# Altium PCB control_block.PcbDoc
Units mm, origin at the board's own origin, x right, y up, seen from the top; angles counter-clockwise.
Board outline 62.5 x 45 mm, 2 copper layers (Top Layer, Bottom Layer), stack 1.5 mm thick; 41 components, 31 nets, 165 pads, 15 vias.
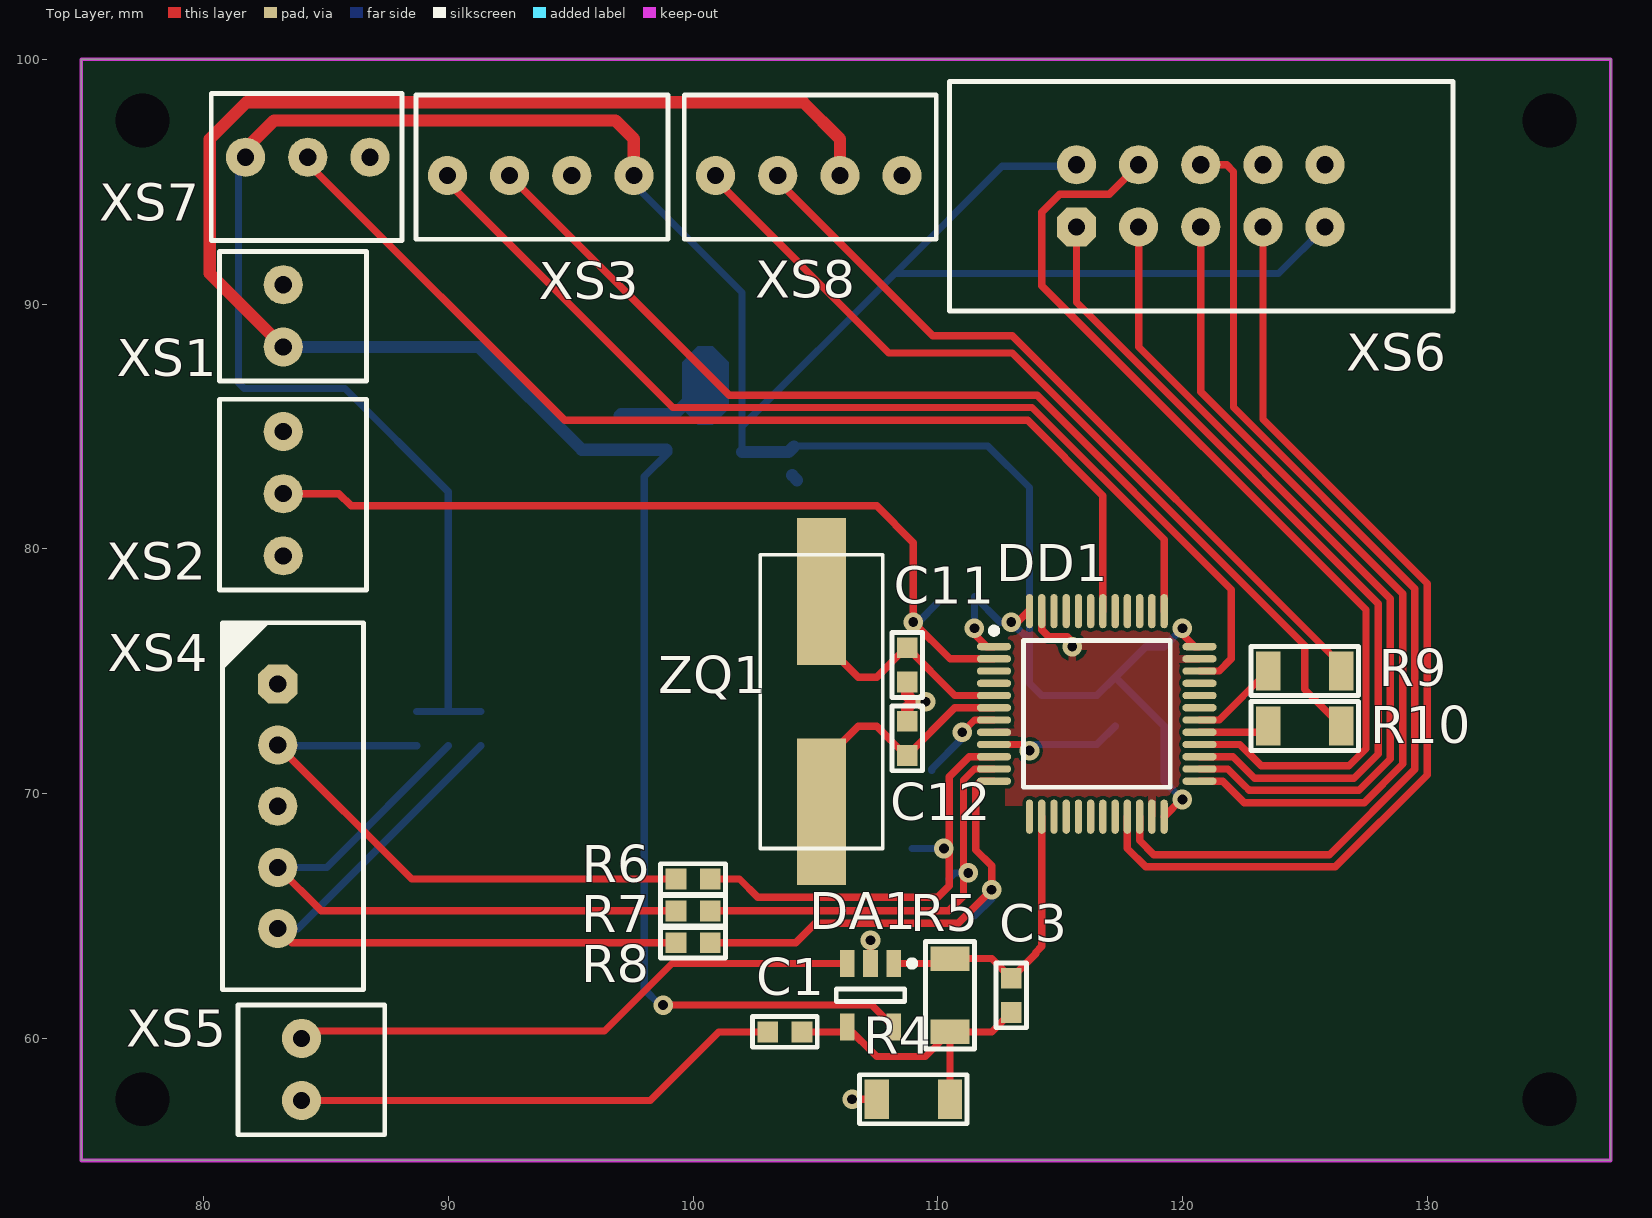
[diagram p0: Top Layer view]
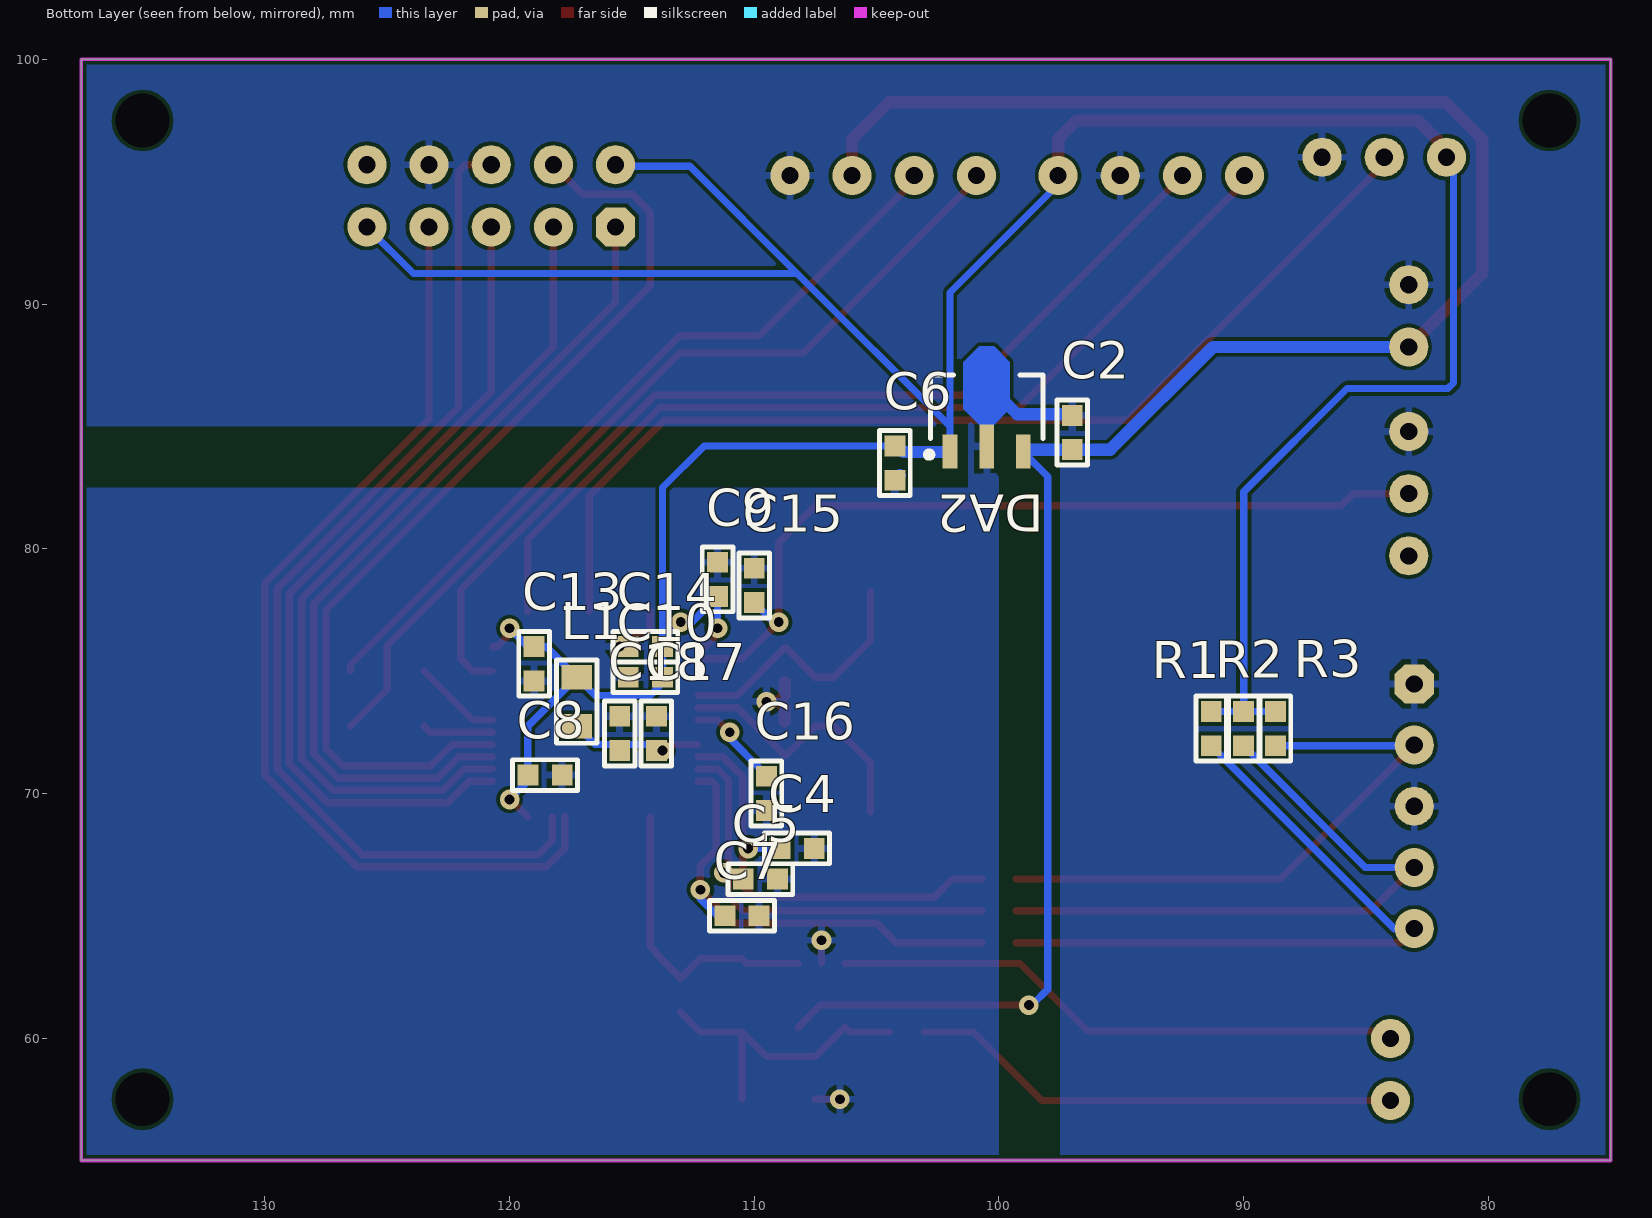
[diagram p1: Bottom Layer view, seen from below]
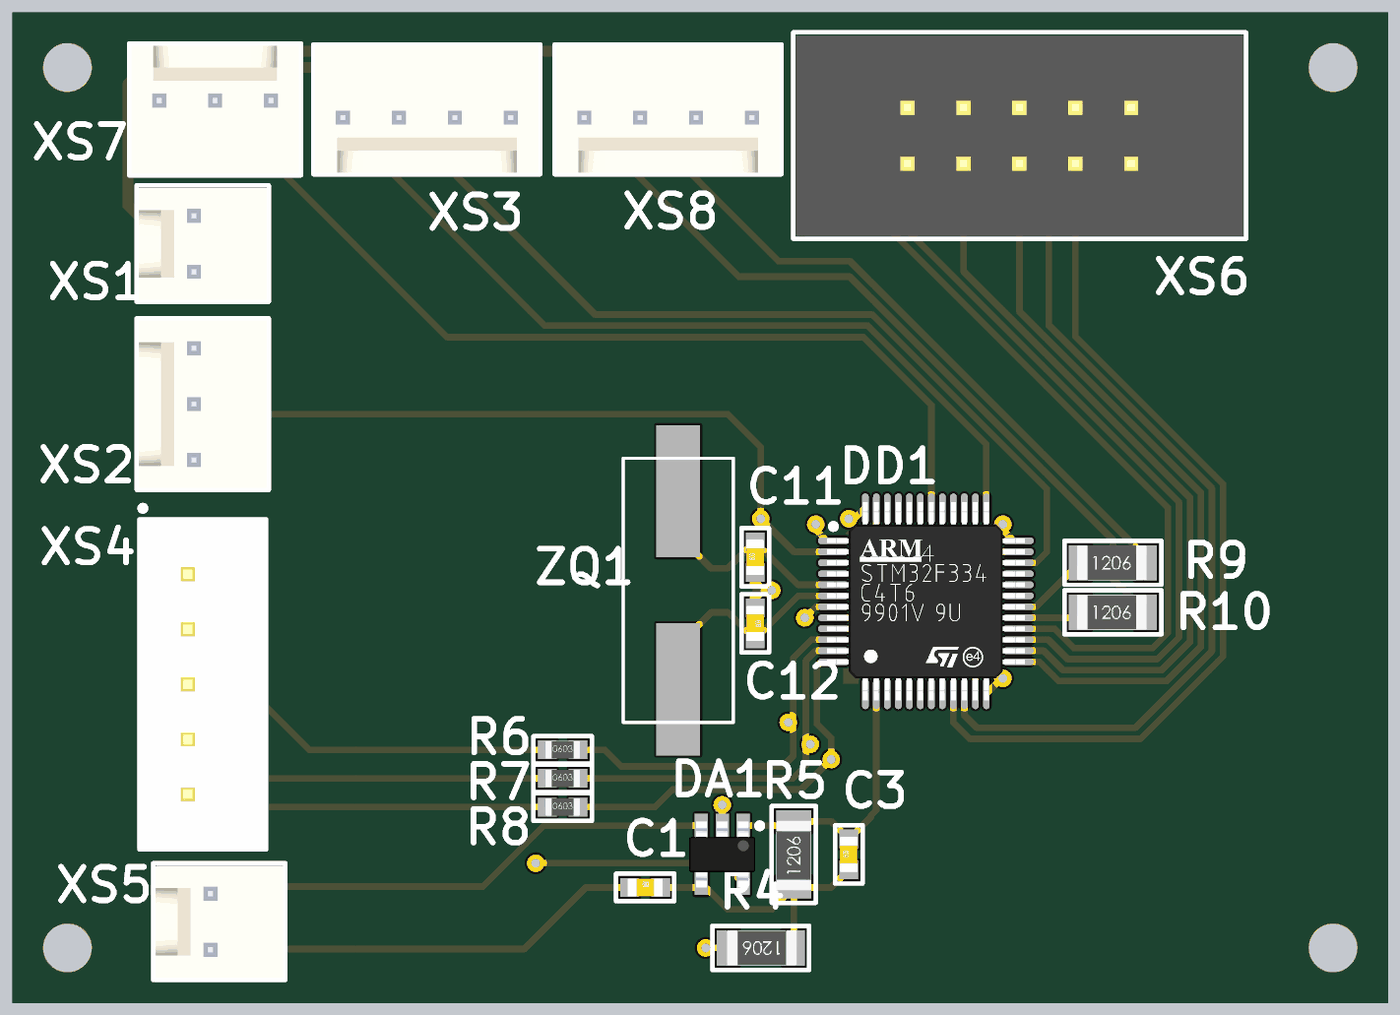
[diagram p2: 3D render of the assembled board from above, using the file's embedded part models]
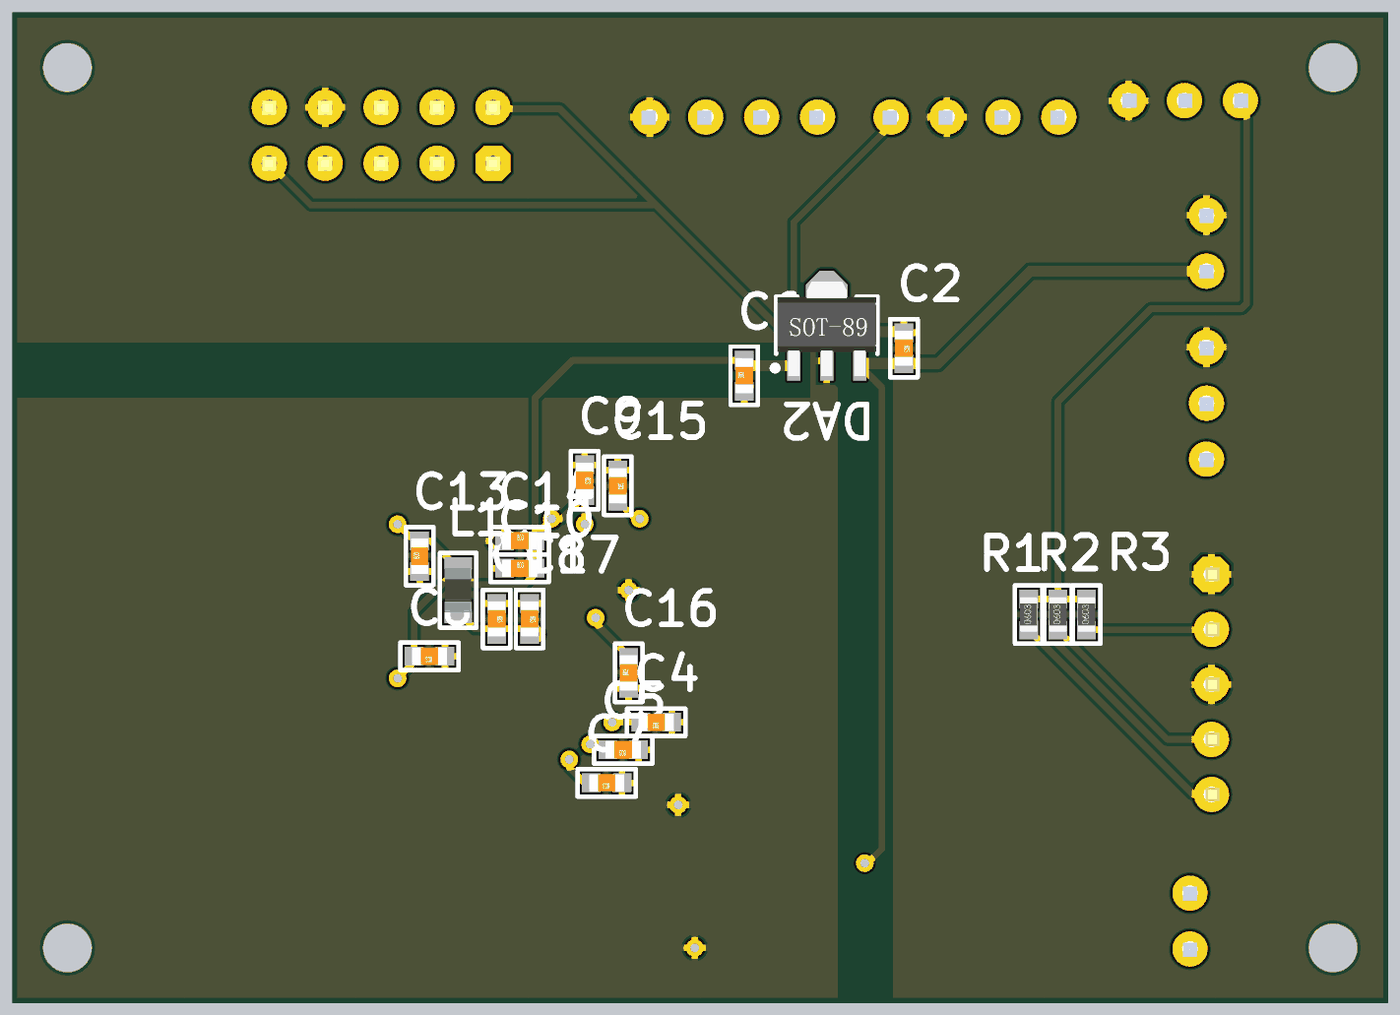
[diagram p3: 3D render of the assembled board from below, using the file's embedded part models]

## Layer stack, top to bottom
Top Layer: signal copper (thickness not stored)
Dielectric 1: dielectric 1.5, FR-4, Dk 4.8
Bottom Layer: signal copper (thickness not stored)

## Board outline
75,55 137.5,55 137.5,100 75,100

## Design rules (kind name [scope] priority, off if disabled: settings)
Clearance [All] p1: gap=0.15 ignorepadtopadclearanceinfootprint=TRUE except(0: Arc-Hole Track-Hole SMDPad-Hole THPad-Hole Via-Hole Fill-Hole Poly-Hole Region-Hole Text-Hole)
ComponentClearance [InComponent('No Component') vs InComponent('No Component')] p1: gap=0.254 collisioncheckmode=3 verticalgap=0.254 showdistances=TRUE
PolygonConnect [All] p1: connectstyle=Relief reliefconductorwidth=0.3 reliefentries=4 polygonreliefangle="90 Angle" airgapwidth=0.2
RoutingVias [All] p1: holewidth=0.5 width=1 viastyle="Through Hole" minholewidth=0.3 minwidth=0.8 maxholewidth=0.7 maxwidth=1.2
SolderMaskExpansion [All] p1: expansion=0.102
Width [All] p1: maxlimit=0.5 minlimit=0.3 preferedwidth=0.3 minimp=50.000000 maximp=50.000000 favimp=50.000000
29 further rules are at their usual default settings.

## Components (designator, comment, footprint, x,y, rotation, side; value= is the part's Value field where it differs from the comment)
C1 "100 нФ" "CAP: 0603" 103.75,60.25 r0 top
C2 "330 нФ" "CAP: 0603" 97,84.75 r270 bottom
C3 "100 нФ" "CAP: 0603" 113,61.75 r90 top
C4 "100 нФ" "CAP: 0603" 108.25,67.75 r0 bottom
C5 "100 нФ" "CAP: 0603" 109.75,66.5 r0 bottom
C6 "100 нФ" "CAP: 0603" 104.25,83.5 r90 bottom
C7 "100 нФ" "CAP: 0603" 110.5,65 r0 bottom
C8 "100 нФ" "CAP: 0603" 118.55,70.75 r0 bottom
C9 "100 нФ" "CAP: 0603" 111.5,78.75 r270 bottom
C10 "100 нФ" "CAP: 0603" 114.45,74.75 r180 bottom
C11 "22 pF" "CAP: 0603" 108.75,75.25 r90 top
C12 "22 pF" "CAP: 0603" 108.75,72.25 r270 top
C13 "100 нФ" "CAP: 0603" 119,75.3 r90 bottom
C14 "4.7 мкФ" "CAP: 0603" 114.45,76 r180 bottom
C15 "100 нФ" "CAP: 0603" 110,78.5 r270 bottom
C16 "100 нФ" "CAP: 0603" 109.5,70 r90 bottom
C17 "10 нФ" "CAP: 0603" 114,72.45 r270 bottom
C18 "1 мкФ" "CAP: 0603" 115.5,72.45 r270 bottom
DA1 "TS321ILT" SOT23-5 107.25,61.75 r270 top
DA2 "78xx" SOT89 100.5,85.775 r90 bottom
DD1 "STM32F103C8T6" 48-LQFP 116.5,73.25 r0 top
L1 "10 мкГн" "IND: 0805" 117.25,73.75 r270 bottom
R1 "10кОм" "RES: 0603" 91.325,72.65 r90 bottom
R2 "10кОм" "RES: 0603" 90,72.65 r90 bottom
R3 "10кОм" "RES: 0603" 88.7,72.65 r90 bottom
R4 "1 кОм" "RES: 1206" 109,57.5 r180 top
R5 "47 кОм" "RES: 1206" 110.5,61.75 r90 top
R6 "10кОм" "RES: 0603" 100,66.5 r0 top
R7 "10кОм" "RES: 0603" 100,65.2 r0 top
R8 "10кОм" "RES: 0603" 100,63.9 r0 top
R9 "220 Ом" "RES: 1206" 125,75 r0 top
R10 "220 Ом" "RES: 1206" 125,72.75 r0 top
XS1 "X2" "CON: WF-02" 83.25,88.25 r90 top
XS2 "X3" "CON: WF-03" 83.25,79.71 r90 top
XS3 "X4" "CON: WF-04" 97.58,95.25 r180 top
XS4 "X5" "CON: CWF-5" 83.025,69.475 r270 top
XS5 "X2" "CON: WF-02" 84,57.45 r90 top
XS6 "X9" "CON: IDC-10MS" 120.75,94.421 r0 top
XS7 "X3" "CON: WF-03" 81.71,96 r0 top
XS8 "X4" "CON: WF-04" 108.54,95.25 r180 top
ZQ1 "AT-41CD2-8MHz" AT-41CD2 105.25,73.75 r270 top

## Footprints (in the part's own frame and the unit in brackets; to place one, negate y for a bottom-side part, rotate by r counter-clockwise, add the part's x,y. Pads: shape width x height; smd on the part's side, far side on the other; paste and mask are expansions set on the pad)
48-LQFP [mm] "QFP, 48-Leads, Body 7x7mm, Pitch 0.5mm, IPC Medium Density"
  oval 1.4x0.3 smd: 1(-4.2,2.75) 2(-4.2,2.25) 3(-4.2,1.75) 4(-4.2,1.25) 5(-4.2,0.75) 6(-4.2,0.25) 7(-4.2,-0.25) 8(-4.2,-0.75) 9(-4.2,-1.25) 10(-4.2,-1.75) 11(-4.2,-2.25) 12(-4.2,-2.75) 25(4.2,-2.75) 26(4.2,-2.25) 27(4.2,-1.75) 28(4.2,-1.25) 29(4.2,-0.75) 30(4.2,-0.25) 31(4.2,0.25) 32(4.2,0.75) 33(4.2,1.25) 34(4.2,1.75) 35(4.2,2.25) 36(4.2,2.75)
  oval 0.3x1.4 smd: 13(-2.75,-4.2) 14(-2.25,-4.2) 15(-1.75,-4.2) 16(-1.25,-4.2) 17(-0.75,-4.2) 18(-0.25,-4.2) 19(0.25,-4.2) 20(0.75,-4.2) 21(1.25,-4.2) 22(1.75,-4.2) 23(2.25,-4.2) 24(2.75,-4.2) 37(2.75,4.2) 38(2.25,4.2) 39(1.75,4.2) 40(1.25,4.2) 41(0.75,4.2) 42(0.25,4.2) 43(-0.25,4.2) 44(-0.75,4.2) 45(-1.25,4.2) 46(-1.75,4.2) 47(-2.25,4.2) 48(-2.75,4.2)
  round 0.5 on Mech1: ""(-4,4)
  silkscreen extent -4.32,-3 3,3.52, body extent -4.5,-4.5 4.5,4.5, height 1.6
AT-41CD2 [mm]
  rect 6x2 smd: 1(-4.5,0) 2(4.5,0)
  silkscreen extent -6,-2.5 6,2.5
"CAP: 0603" [mm]
  rect 0.85x0.85 smd: 1(-0.7,0) 2(0.7,0)
  silkscreen extent -1.33,-0.63 1.33,0.63, body extent -0.8,-0.4 0.8,0.4, height 0.3
"CON: CWF-5" [mm]
  oct 1.6x1.6 hole 0.7: 1(-5,0)
  round 1.6 hole 0.7: 2(-2.5,0) 3(0,0) 4(2.5,0) 5(5,0)
  round 0.5 on Top Overlay: ""(-8,-2.1)
  silkscreen extent -7.5,-2.25 7.5,3.5, body extent -7.5,-2.25 7.5,3.5, height 7.05
"CON: IDC-10MS" [mm] "IDC-10MS 10 pin PCB-mount header"
  oct 1.6x1.6 hole 0.7: 1(-5.08,-1.27)
  round 1.6 hole 0.7: 2(-5.08,1.27) 3(-2.54,-1.27) 4(-2.54,1.27) 5(0,-1.27) 6(0,1.27) 7(2.54,-1.27) 8(2.54,1.27) 9(5.08,-1.27) 10(5.08,1.27)
  round 0.5 on Mech1: ""(-9.6,-4)
  round 0.5 on Top Overlay: ""(-9.6,-4)
  silkscreen extent -10.28,-4.7 10.3,4.67, body extent -10.14,-4.57 10.16,4.53, height 9
"CON: WF-02" [mm]
  round 1.6 hole 0.7: 1(0,0) 2(2.54,0)
  round 0.5 on Mech1: ""(-0.8,2)
  silkscreen extent -1.4,-3.4 3.9,2.6, body extent -1.3,-3.3 3.78,2.5, height 11.5
"CON: WF-03" [mm]
  round 1.6 hole 0.7: 1(0,0) 2(2.54,0) 3(5.08,0)
  round 0.5 on Mech1: ""(-0.8,2)
  silkscreen extent -1.4,-3.4 6.4,2.6, body extent -1.31,-3.3 6.31,2.5, height 11.5
"CON: WF-04" [mm]
  round 1.6 hole 0.7: 1(0,0) 2(2.54,0) 3(5.08,0) 4(7.62,0)
  round 0.5 on Mech1: ""(-0.8,2)
  silkscreen extent -1.4,-3.3 8.9,2.6, body extent -1.33,-3.27 8.83,2.53, height 11.66
"IND: 0805" [mm]
  rect 1x1.25 smd: 1(-1,0) 2(1,0)
  silkscreen extent -1.7,-0.82 1.7,0.82, body extent -1,-0.62 1,0.63, height 0.85
"RES: 0603" [mm]
  rect 0.85x0.85 smd: 1(-0.7,0) 2(0.7,0)
  silkscreen extent -1.33,-0.63 1.33,0.63, body extent -0.8,-0.4 0.8,0.4, height 0.44
"RES: 1206" [mm]
  rect 1x1.6 smd: 1(-1.5,0) 2(1.5,0)
  silkscreen extent -2.2,-1 2.2,1, body extent -1.65,-0.8 1.55,0.8, height 0.47
SOT23-5 [mm] "pitch 0.95 mm"
  rect 1.1x0.6 smd: 1(-1.3,0.95) 2(-1.3,0) 3(-1.3,-0.95) 4(1.3,-0.95) 5(1.3,0.95)
  round 0.5 on Mech1: ""(-1.1,1.1)
  silkscreen extent -1.42,-1.4 0.25,1.83, body extent -1.5,-1.5 1.5,1.5, height 1.3
SOT89 [mm]
  rect 1.4x0.6 smd: 1(-1.8,1.5) 3(-1.8,-1.5)
  rect 1.8x0.6 smd: 2(-1.6,0)
  round 0.5 on Mech1: ""(-1.8,1.8)
  Top Layer region: -0.7,0.3 -0.05,0.95 1.85,0.95 2.5,0.3 2.5,-0.3 1.85,-0.95 -0.05,-0.95 -0.7,-0.3
  silkscreen extent -2.05,-2.3 1.32,2.48, body extent -2.3,-2.25 2,2.25, height 1.51

## Part data
C1 C2 C3 C4 C5 C6 C7 C8 C9 C10 C11 C12 C13 C14 C15 C16 C17 C18: library part C_const
DA1: library part single_channel_op_amp
L1: library part L
R1 R2 R3 R4 R5 R6 R7 R8 R9 R10: library part Res
ZQ1: library part ZQ
XS1: =address1=A3-XS1:1, =address2=A3-XS1:2, circuit1=+12V, circuit2=GND
XS2: =address1=A3-XS2:1, =address2=A3-XS2:2, =address3=A3-XS2:3, circuit1=NC, circuit2=SWITCH, circuit3=GND
XS3: =address1=A3-XS3:1, =address2=A3-XS3:2, =address3=A3-XS3:3, =address4=A3-XS3:4, circuit1=+3.3V, circuit2=GND, circuit3=SWDIO, circuit4=SWCLK
XS4: =address1=A3-XS4:1, =address2=A3-XS4:2, =address3=A3-XS4:3, =address4=A3-XS4:4, =address5=A3-XS4:5, circuit1=GND, circuit2=A, circuit3=GND, circuit4=B, cirtuit5=SWITCH
XS5: =address1=A3-XS5:1, =address2=A3-XS5:2, circuit1=T+, circuit2=T-
XS6: =address1=A3-XS6:1, =address2=A3-XS6:2, =address3=A3-XS6:3, =address4=A3-XS6:4, =address5=A3-XS6:5, =address6=A3-XS6:6, =address7=A3-XS6:7, =address8=A3-XS6:8, =address9=A3-XS6:9, circtuit1=MISO, circtuit2=+3.3V, circtuit3=SCK, circtuit4=MOSI, circtuit5=CS, circtuit6=RESET, circtuit7=DC, circtuit8=GND, circtuit9=+3.3V
XS7: =address1=A3-XS7:1, =address2=A3-XS7:2, =address3=A3-XS7:3, circuit1=+3.3V, circuit2=PWM, circuit3=GND
XS8: =address1=A3-XS8:1, =address2=A3-XS8:2, =address3=A3-XS8:3, =address4=A3-XS8:4, circuit1=GND, circuit2=+12V, circuit3=FB, circuit4=PWM

## Free pads (board coordinates)
  round 0 hole 2.2: 2(77.5,57.5) 3(77.5,97.5) 4(135,57.5) 4(135,97.5)

## Via types
v1: diameter 0.8, hole 0.4, Top Layer to Bottom Layer, 15 vias

## Nets (pads, with @x,y where several pads share a name; then routed paths per layer and width w, separated by ;. In a path a pad name is that pad's centre, name@x,y a point inside that pad or via, vN(x,y) a via of type N, cw(c..) or ccw(c..) an arc to the next point about the centre after c; other vN are vias at no path point)
+3.3V: C6.2 C8.2 C9.2 C10.2 C13.2 C14.2 DA2.1 DD1.1 DD1.24 DD1.36 DD1.48 L1.1 R1.2 R2.2 R3.2 XS3.1 XS6.2 XS6.9 XS7.1 | length 142.1
  Top Layer w0.3: v1(111.5,76.75) 111.5,76.5 112,76 DD1.1 ; v1(113,77) 113.25,77 113.7,77.45 DD1.48 ; DD1.24 119.95,69.75 v1(120,69.75) ; v1(120,76.75) 120,76.5 120.5,76 DD1.36
  Top Layer w0.5: XS7.1 81.71,96.34 82.87,97.5 96.83,97.5 97.58,96.75 XS3.1
  Bottom Layer w0.3: XS7.1 81.425,95.715 81.425,86.775 81.65,86.55 85.775,86.55 90,82.325 R2.2 ; R3.2 R2.2 ; R1.2 R2.2 ; XS3.1@97.486,94.986 102,90.473 102,85 ; DA2.1@102,83.95 DA2.1 102,85 ; C6.2 112.05,84.2 113.75,82.5 C14.2@113.75,76.25 ; v1(111.5,76.75) C9.2 112.55,77 v1(113,77) C14.2@113.75,76.25 ; XS6.2 115.604,95.625 112.625,95.625 108.25,91.25 ; v1(120,69.75) 119.25,70.5 C8.2 119.25,72.75 L1.1 ; v1(120,76.75) 119.25,76 C13.2 118.5,76 L1.1 ; XS6.9 123.929,91.25 108.25,91.25 ; 102,85 108.25,91.25 ; C14.2@113.75,76.25 C14.2 C10.2 113.75,74.5 114.25,74 116.5,74 L1.1
  Bottom Layer w0.5: DA2.1@102,83.95 103.9,83.95 C6.2@104.127,84.177
+12V: C2.2 DA1.5 DA2.3 XS1.1 XS8.2 | length 88.8
  Top Layer w0.3: v1(98.775,61.35) 107.3,61.35 DA1.5
  Top Layer w0.5: XS1.1 80.25,91.25 80.25,96.75 81.75,98.25 104.5,98.25 106,96.75 XS8.2
  Bottom Layer w0.3: v1(98.775,61.35) 98.65,61.35 98,62 98,82.95 DA2.3@99,83.95
  Bottom Layer w0.5: XS1.1 91.25,88.25 95.45,84.05 C2.2 DA2.3@98.9,84.05
GND: C2.1 C4.1 C5.1 C6.1 C7.1 C8.1 C9.1 C10.1 C11.1 C12.1 C13.1 C14.1 C15.1 C16.1 C17.1 C18.1 DA1.2 DA2.2 DD1.8 DD1.23 DD1.35 DD1.47 R4.2 XS1.2 XS2.3 XS3.2 XS4.1 XS4.3 XS6.8 XS7.3 XS8.1 | length 10.6
  Top Layer w0.3: v1(106.5,57.5) R4.2 ; DA1.2 v1(107.25,64) ; DD1.47 114.25,76.764 114.25,76.693 114.543,76.4 115.3,76.4 115.5,76.2 v1(115.5,76)
  Top Layer w0.5: C12.1 108.75,73.5 109,73.75 ; C11.1 108.75,74 109,73.75 ; v1(109.5,73.75) 109,73.75
  Bottom Layer w0.5: C2.1 97.05,85.5 99.25,85.5 100.25,86.5 ; C6.1@104.05,83 C6.1
NetC1_1: C1.1 XS5.1 | length 20.2
  Top Layer w0.3: XS5.1 98.25,57.45 101.05,60.25 C1.1
NetC1_2: C1.2 C3.1 DA1.4 R4.1 R5.1 | length 12.6
  Top Layer w0.3: C1.2 106.1,60.25 DA1.4 107.5,59.25 109.5,59.25 R5.1 ; R4.1 R5.1 ; C3.1 112.2,60.25 R5.1
NetC3_2: C3.2 DA1.1 DD1.14 R5.2 | length 12.3
  Top Layer w0.3: DA1.1 110.3,63.05 R5.2 112.2,63.25 C3.2 114,63.45 114,63.5 114.25,63.75 DD1.14
NetC4_2: C4.2 DD1.10 R6.2 | length 18.2
  Top Layer w0.3: R6.2 101.9,66.5 102.65,65.75 110,65.75 110.475,66.225 110.475,70.682 111.293,71.5 DD1.10
  Bottom Layer w0.3: C4.2 v1(110.25,67.75)
NetC5_2: C5.2 DD1.11 R7.2 | length 17.7
  Top Layer w0.3: R7.2 110.45,65.2 111.05,65.8 111.05,70.55 111.5,71 DD1.11
  Bottom Layer w0.3: C5.2 110.7,66.75 v1(111.25,66.75)
NetC7_2: C7.2 DD1.12 R8.2 | length 19.4
  Top Layer w0.3: R8.2 104.2,63.9 105,64.7 110.836,64.7 v1(112.2,66.064) 112.2,67.04 111.55,67.69 111.55,70.3 111.75,70.5 DD1.12
  Bottom Layer w0.3: C7.2 111.5,65 112.2,65.7 v1(112.2,66.064)
NetC11_2: C11.2 DD1.5 ZQ1.1 | length 11
  Top Layer w0.3: ZQ1.1 105.25,76.25 106.75,74.75 107.5,74.75 108.7,75.95 C11.2 110.7,74 111,74 DD1.5
NetC12_2: C12.2 DD1.6 ZQ1.2 | length 11
  Top Layer w0.3: ZQ1.2 105.25,71.25 106.75,72.75 107.5,72.75 108.7,71.55 C12.2 110.7,73.5 DD1.6
NetC15_2: C15.2 DD1.2 XS2.2 | length 35.1
  Top Layer w0.3: XS2.2 85.525,82.25 86.025,81.75 107.5,81.75 109,80.25 v1(109,77) 110.5,75.5 DD1.2
  Bottom Layer w0.3: v1(109,77) 109.2,77 C15.2
NetC16_2: C16.2 DD1.7 | length 3.6
  Top Layer w0.3: v1(111,72.5) 111.5,73 DD1.7
  Bottom Layer w0.3: C16.2@109.75,70.95 109.75,71 111,72.25 v1(111,72.5)
NetDA1_1: DA1.3 XS5.2 | length 23.4
  Top Layer w0.3: XS5.2@84,60.29 96.379,60.29 99.139,63.05 DA1.3
NetDD1_21: DD1.21 XS6.7 | length 40.6
  Top Layer w0.3: DD1.21 117.75,67.75 118.5,67 126.25,67 130,70.75 130,78.578 123.29,85.288 XS6.7
NetDD1_22: DD1.22 XS6.6 | length 42.9
  Top Layer w0.3: DD1.22 118.25,68.076 118.826,67.5 126.008,67.5 129.5,70.992 129.5,78.371 122.09,85.781 122.09,95.41 121.809,95.691 XS6.6
NetDD1_25: DD1.25 XS6.5 | length 34.7
  Top Layer w0.3: DD1.25 121.65,70.5 122.525,69.625 127.426,69.625 129,71.199 129,78.164 120.75,86.414 XS6.5
NetDD1_26: DD1.26 XS6.3 | length 34.7
  Top Layer w0.3: XS6.3 118.21,88.247 128.5,77.957 128.5,71.407 127.218,70.125 122.737,70.125 122.576,70.285 122.572,70.285 121.857,71 DD1.26
NetDD1_27: DD1.27 XS6.1 | length 34.7
  Top Layer w0.3: XS6.1 115.67,90.08 128,77.75 128,71.684 128,71.614 127.011,70.625 122.944,70.625 122.069,71.5 DD1.27
NetDD1_28: DD1.28 XS6.4 | length 39.6
  Top Layer w0.3: XS6.4 117.01,94.491 114.991,94.491 114.25,93.75 114.25,90.75 127.5,77.5 127.5,71.821 126.804,71.125 123.221,71.125 122.346,72 DD1.28
NetDD1_29: DD1.29 R10.1 | length 2.9
  Top Layer w0.3: DD1.29 123.25,72.5 R10.1
NetDD1_30: DD1.30 R9.1 | length 3.6
  Top Layer w0.3: DD1.30 121.5,73 R9.1
NetDD1_34: DD1.34 XS3.3 | length 40.8
  Top Layer w0.3: XS3.3 101.475,86.275 114.061,86.275 122,78.336 122,75.5 121.5,75 DD1.34
NetDD1_37: DD1.37 XS3.4 | length 38.5
  Top Layer w0.3: XS3.4@89.83,95.12 99.175,85.775 113.854,85.775 119.25,80.379 DD1.37
NetDD1_42: DD1.42 XS7.2 | length 42.4
  Top Layer w0.3: XS7.2@84.58,95.42 94.75,85.25 113.672,85.25 116.75,82.172 DD1.42
NetR1_1: R1.1 R8.1 XS4.5 | length 27.9
  Top Layer w0.3: XS4.5 83.6,63.9 R8.1
  Bottom Layer w0.3: XS4.5 83.85,64.475 R1.1
NetR2_1: R2.1 R7.1 XS4.4 | length 26
  Top Layer w0.3: XS4.4 84.8,65.2 R7.1
  Bottom Layer w0.3: XS4.4 85.025,66.975 R2.1
NetR3_1: R3.1 R6.1 XS4.2 | length 24.8
  Top Layer w0.3: XS4.2 88.5,66.5 R6.1
  Bottom Layer w0.3: XS4.2@82.6,72.4 XS4.2 83.05,71.95 R3.1
NetR9_2: R9.2 XS8.3 | length 31.7
  Top Layer w0.3: XS8.3 103.46,95.04 109.8,88.7 113.05,88.7 126.5,75.25 R9.2
NetR10_2: R10.2 XS8.4 | length 36
  Top Layer w0.3: XS8.4 100.92,95.08 108,88 113.043,88 125,76.043 125,74.25 R10.2
VDDA: C17.2 C18.2 DD1.9 L1.2 | length 5.1
  Top Layer w0.3: DD1.9 113.5,72 v1(113.75,71.75)
  Bottom Layer w0.3: C17.2@114,72 116.5,72 L1.2
pads on no net: DA1. DA2. DD1. DD1.3 DD1.4 DD1.13 DD1.15 DD1.16 DD1.17 DD1.18 DD1.19 DD1.20 DD1.31 DD1.32 DD1.33 DD1.38 DD1.39 DD1.40 DD1.41 DD1.43 DD1.44 DD1.45 DD1.46 XS1. XS2. XS2.1 XS3. XS4. XS5. XS6. XS6.10 XS7. XS8.

## Polygon pours and split planes (outlines as drawn)
GND on Bottom Layer "Bottom Layer-GND 1" (solid, pour order 14): 97.5,55 75,55 75,100 137.5,100 137.5,85 97.5,85
GND on Bottom Layer "Bottom Layer-GND" (solid, pour order 12): 100,55 100,82.5 137.5,82.5 137.5,55
GND on Bottom Layer "GND_L02_P016" (solid, pour order 16): 101.25,82 101.25,85.25 100,85.25 100,82
no net on Bottom Layer "Bottom Layer-No Net" (solid, pour order 0): 65.25,100.75
GND on Top Layer "Top Layer-GND" (solid, pour order 6): 112.75,77 120.25,77 120.25,69.5 112.75,69.5

## Keep-outs
Keep-Out Layer:
  the board outline again, w0.15